# Altium PCB radarr.PcbDoc (part 3 of 3)
Units mm, origin at the board's own origin, x right, y up, seen from the top; angles counter-clockwise.
Board outline 98.42 x 99.44 mm, 4 copper layers (Top Layer, Signal Layer 1, Signal Layer 2, Bottom Layer), stack 1.596 mm thick; 146 components, 99 nets, 534 pads, 3373 vias.
Unrouted connection lines stored in the file: 90.
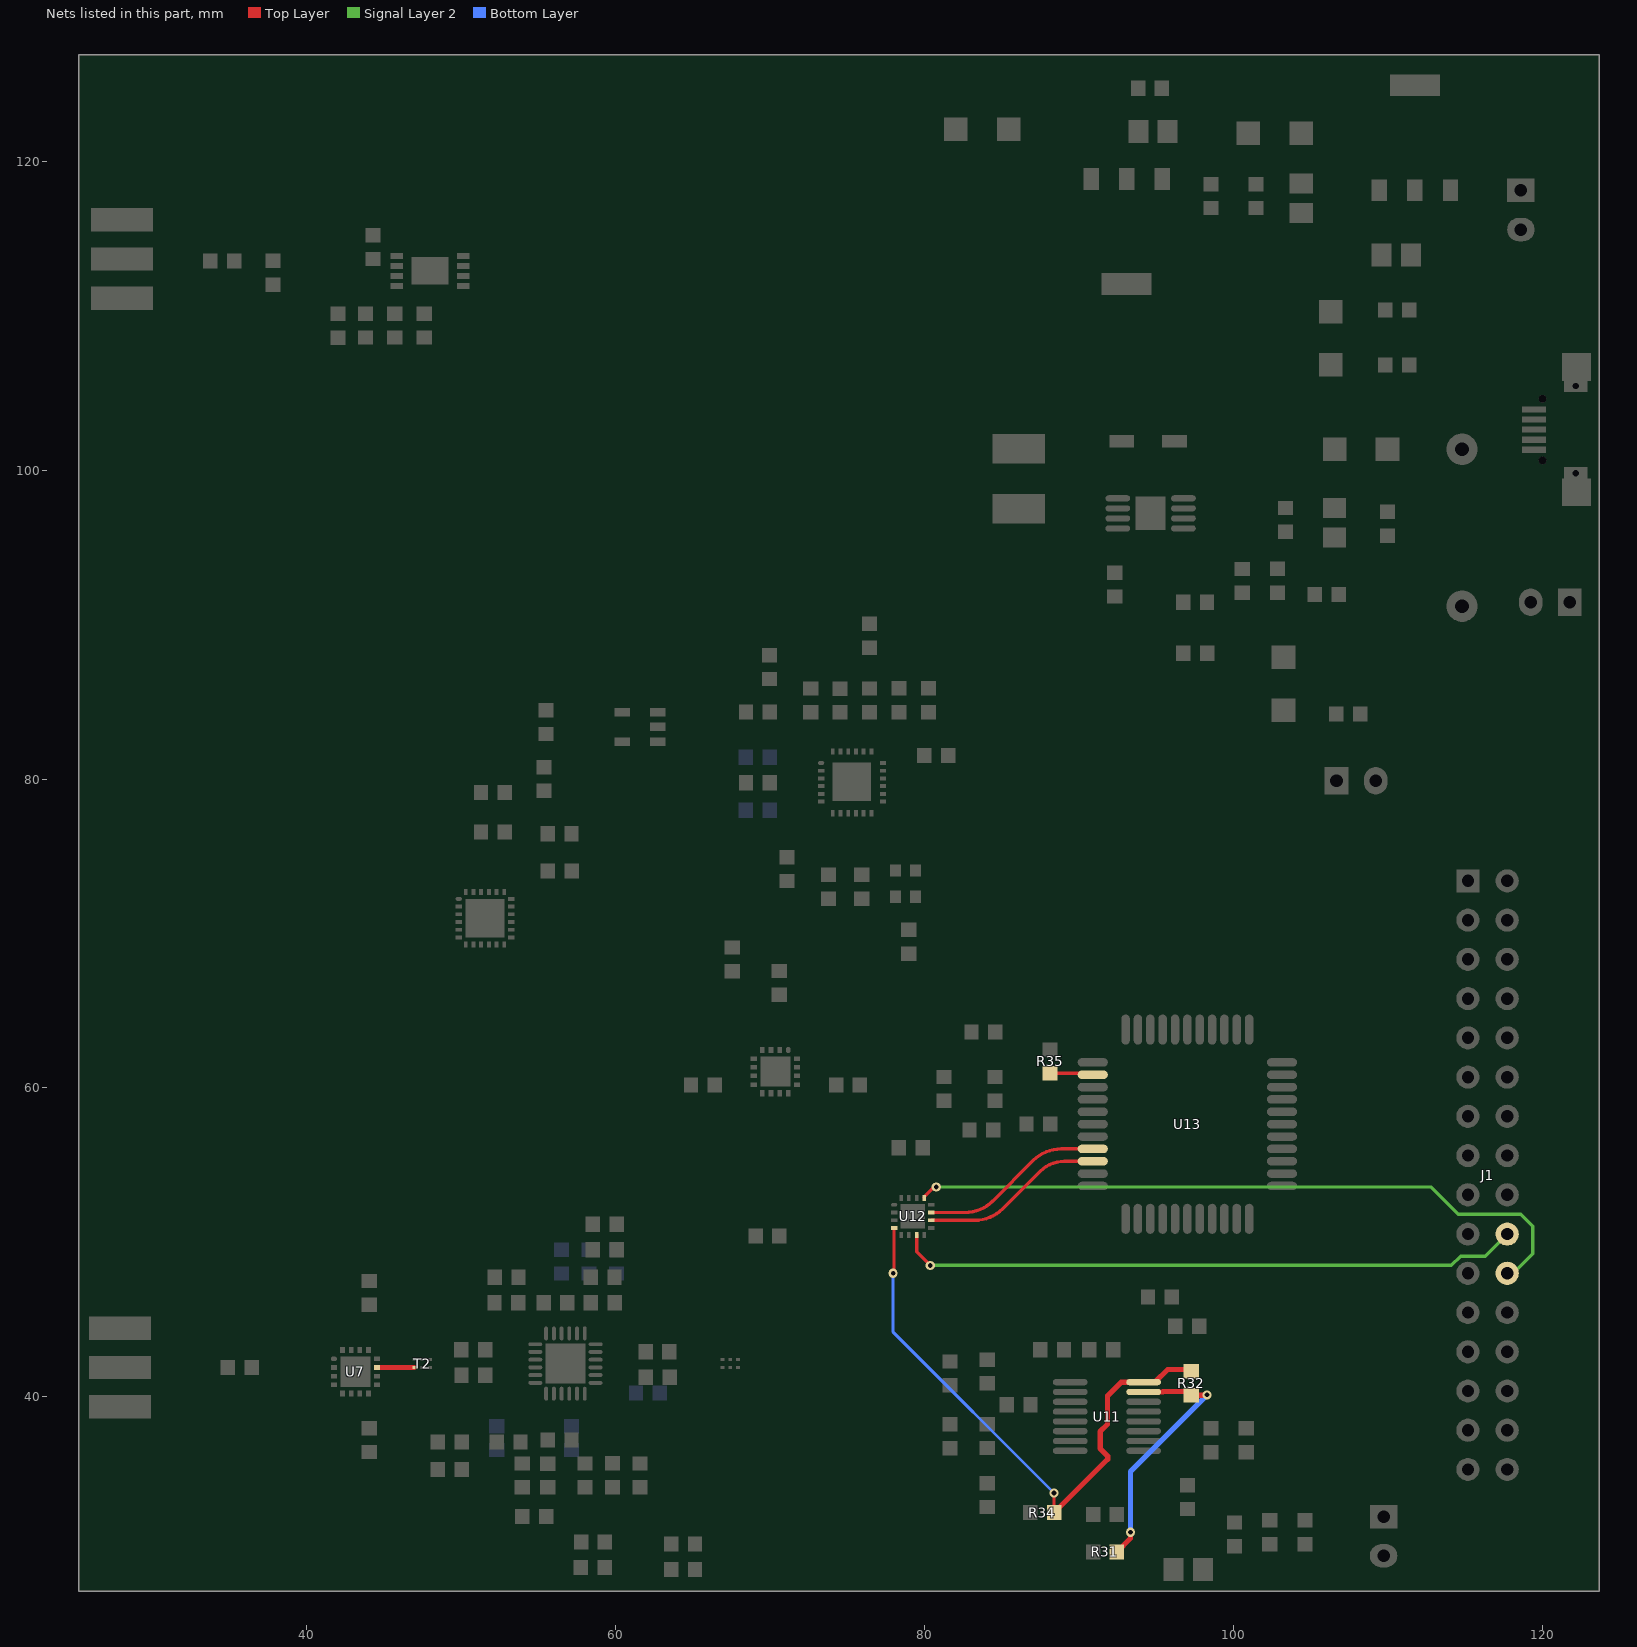
[diagram p5: the nets of this part, all layers, seen from the top]

## Via types
v1: diameter 0.45, hole 0.2, Top Layer to Bottom Layer, tented both sides, 3291 vias
v2: diameter 0.6, hole 0.3, Top Layer to Bottom Layer, tented both sides, 51 vias
v3: diameter 0.559, hole 0.305, Top Layer to Bottom Layer, tented both sides, 23 vias
v4: diameter 0.5, hole 0.2, Top Layer to Bottom Layer, 8 vias

## Nets (pads, with @x,y where several pads share a name; then routed paths per layer and width w, separated by ;. In a path a pad name is that pad's centre, name@x,y a point inside that pad or via, vN(x,y) a via of type N, cw(c..) or ccw(c..) an arc to the next point about the centre after c; other vN are vias at no path point) (continued)
NetR31_1: R31.1 R32.1 U11.15 | length 16.8
  Top Layer w0.345: R31.1@92.464,29.972 93.345,30.853 v2(93.345,31.242) ; U11.15@94.196,40.322 95.429,40.322 95.457,40.351 97.047,40.351 R32.1@97.282,40.116 98.282,40.116 v2(98.298,40.132)
  Bottom Layer w0.345: v2(93.345,31.242) 93.345,35.179 v2(98.298,40.132)
NetR32_2: R32.2 R34.1 U11.16 U12.4 | length 38.4
  Top Layer w0.2: v2(77.978,48.006) 78.029,48.057 78.029,50.92 U12.4@78.048,50.939 ; v2(88.392,33.782) 88.392,32.528 R34.1@88.408,32.512
  Top Layer w0.345: R34.1@88.408,32.512 91.865,35.969 91.865,36.181 91.384,36.662 91.384,37.76 91.856,38.232 91.856,40.07 92.736,40.949 94.196,40.949 U11.16@94.196,40.957 94.932,40.957 95.758,41.783 97.155,41.783 R32.2@97.282,41.656
  Bottom Layer w0.2: v2(77.978,48.006) 77.978,44.196 v2(88.392,33.782)
NetR35_2: R35.2 U13.35 | length 2.8
  Top Layer w0.22: R35.2@88.138,60.952 90.676,60.952 cw(c90.676,60.631) U13.35@90.903,60.858
NetT2_1: T2.1 U7.11 | length 2.4
  Top Layer w0.345: U7.11@44.577,41.91 T2.1@46.99,41.91
NetU12_10: U12.10 U13.42 | length 11.8
  Top Layer w0.22: U12.10@80.448,51.439 83.28,51.439 ccw(c83.28,53.979) 85.076,52.183 87.503,54.61 cw(c89.067,53.046) 89.067,55.258 U13.42@90.903,55.258
NetU12_11: U12.11 U13.41 | length 11.9
  Top Layer w0.22: U12.11@80.448,51.939 82.637,51.939 ccw(c82.637,54.479) 84.433,52.683 87.064,55.314 cw(c88.86,53.518) 88.86,56.058 U13.41@90.903,56.058
VGA_GAIN: J1.26 U12.7 | length 40.5
  Top Layer w0.22: U12.7@79.498,50.489 79.498,49.407 v2(80.391,48.514)
  Signal Layer 2 w0.22: v2(80.391,48.514) 114.122,48.514 114.728,49.12 116.303,49.12 J1.26@117.729,50.546
VGAC: J1.27 U12.13 | length 44.7
  Top Layer w0.22: U12.13@79.998,52.889 79.998,52.947 80.645,53.594 v2(80.772,53.594)
  Signal Layer 2 w0.22: v2(80.772,53.594) 112.776,53.594 114.554,51.816 118.618,51.816 119.38,51.054 119.38,49.276 118.11,48.006 J1.27@117.729,48.006
pads on no net: J2. J2.2 J2.3 J2.4 J2.6 T1.6 T2.6 U2.1 U2.2 U2.3 U2.4 U2.5 U2.6 U2.7 U2.8 U2.9 U2.10 U2.11 U2.12 U2.13 U2.14 U2.17 U2.18 U2.19 U2.21 U2.23 U2.24 U3.21 U4.1 U4.3 U4.4 U4.5 U4.6 U4.7 U4.9 U4.10 U4.12 U4.14 U4.16 U5.22 U7.1 U7.3 U7.4 U7.5 U7.6 U7.7 U7.9 U7.10 U7.12 U7.14 U7.16 U11.8 U11.9 U12.2 U12.3 U12.9 U12.12 U13.8 U13.9 U13.10 U13.26 U13.27 U13.30 U13.32 U13.34 U13.38 U13.40 U13.43 U13.44

## Polygon pours and split planes (outlines as drawn)
GND on Bottom Layer "GND_L04_P000" (solid, pour order 0): 25.146,27.305 25.273,27.432 123.698,27.432 123.698,126.873 25.146,126.873 25.146,27.432 25.273,27.305
GND on Signal Layer 2 "GND_L03_P002" (solid, pour order 2): 25.146,126.873 25.273,126.746 25.273,27.432 123.698,27.432 123.698,126.873
GND on Signal Layer 1 "GND_L02_P004" (solid, pour order 4): 25.146,126.873 25.146,27.432 123.698,27.432 123.698,126.873
GND on Top Layer "GND_L01_P010" (solid, pour order 10): 123.698,126.873 123.698,27.432 123.571,27.305 25.273,27.305 25.273,126.746 25.4,126.873

## Other copper
Signal Layer 1:
  pour cut-out: 25.4,43.434 30.353,43.434 30.353,40.513 30.48,40.386 25.4,40.386
  pour cut-out: 25.4,115.443 30.353,115.443 30.353,112.014 25.4,112.014

## Silkscreen, mask and mechanical layers (free items; w line width, h text height)
Top Overlay:
  text "3V3" at 122.555,119.634 h2 r90
  text "RFOUT / TX" at 30.988,99.314 h2 r90
  text "5VIN" at 115.443,84.455 h2
  text "12V" at 102.362,75.819 h2
  text "MIXEN" at 119.253,73.025 h1
  text "AD1" at 109.474,72.898 h1
  text "AD2" at 109.347,70.612 h1
  text "GND" at 120.396,70.358 h1
  text "AD3" at 109.347,68.072 h1
  text "_MUXo" at 118.618,67.564 h1
  text "AD4" at 109.22,65.278 h1
  text "_LE" at 119.761,65.278 h1
  text "_Dat" at 119.634,62.611 h1
  text "AD5" at 109.093,62.357 h1
  text "_CLK" at 119.507,60.198 h1
  text "AD6" at 108.839,59.69 h1
  text "_CE" at 120.015,57.912 h1
  text "AD7" at 108.966,57.404 h1
  text "AD8" at 108.966,54.864 h1
  text "_Tx\ / DATA" at 118.618,53.975 h1
  text "GND" at 119.253,52.578 h1
  text "AD9" at 109.093,52.451 h1
  text "AD10" at 108.458,49.911 h1
  text "RFIN / RX" at 31.369,49.784 h2 r90
  text "VGAIN" at 118.999,49.784 h1
  text "AD11" at 108.966,47.498 h1
  text "VGAC" at 119.507,47.498 h1
  text "AD12" at 108.077,45.085 h1
  text "AD13" at 108.077,42.672 h1
  text "AD14" at 108.077,39.751 h1
  text "GND" at 122.047,37.719 h2 r90
  text "ADOTR" at 106.934,37.338 h1
  text "ADCLK" at 107.061,34.925 h1
  text "2V5" at 115.824,28.321 h2 r90
Top Solder:
  lines w0: 38.481,94.742 38.735,94.488
Mechanical 1:
  lines w0.2: 25.146,27.432 25.146,126.873 123.698,126.873 123.698,27.432 25.146,27.432

## Text inside footprints (layer, text, board x,y; h text height)
J2: Top Overlay "+" at 119.316,99.316 h1 r90